# Altium PCB CH32Vx03C-R0-1v0.PcbDoc
Units mil, origin at the board's own origin, x right, y up, seen from the top; angles counter-clockwise.
Board outline 1801.31 x 2204.72 mil, 2 copper layers (Top Layer, Bottom Layer); 36 components, 55 nets, 190 pads, 257 vias.
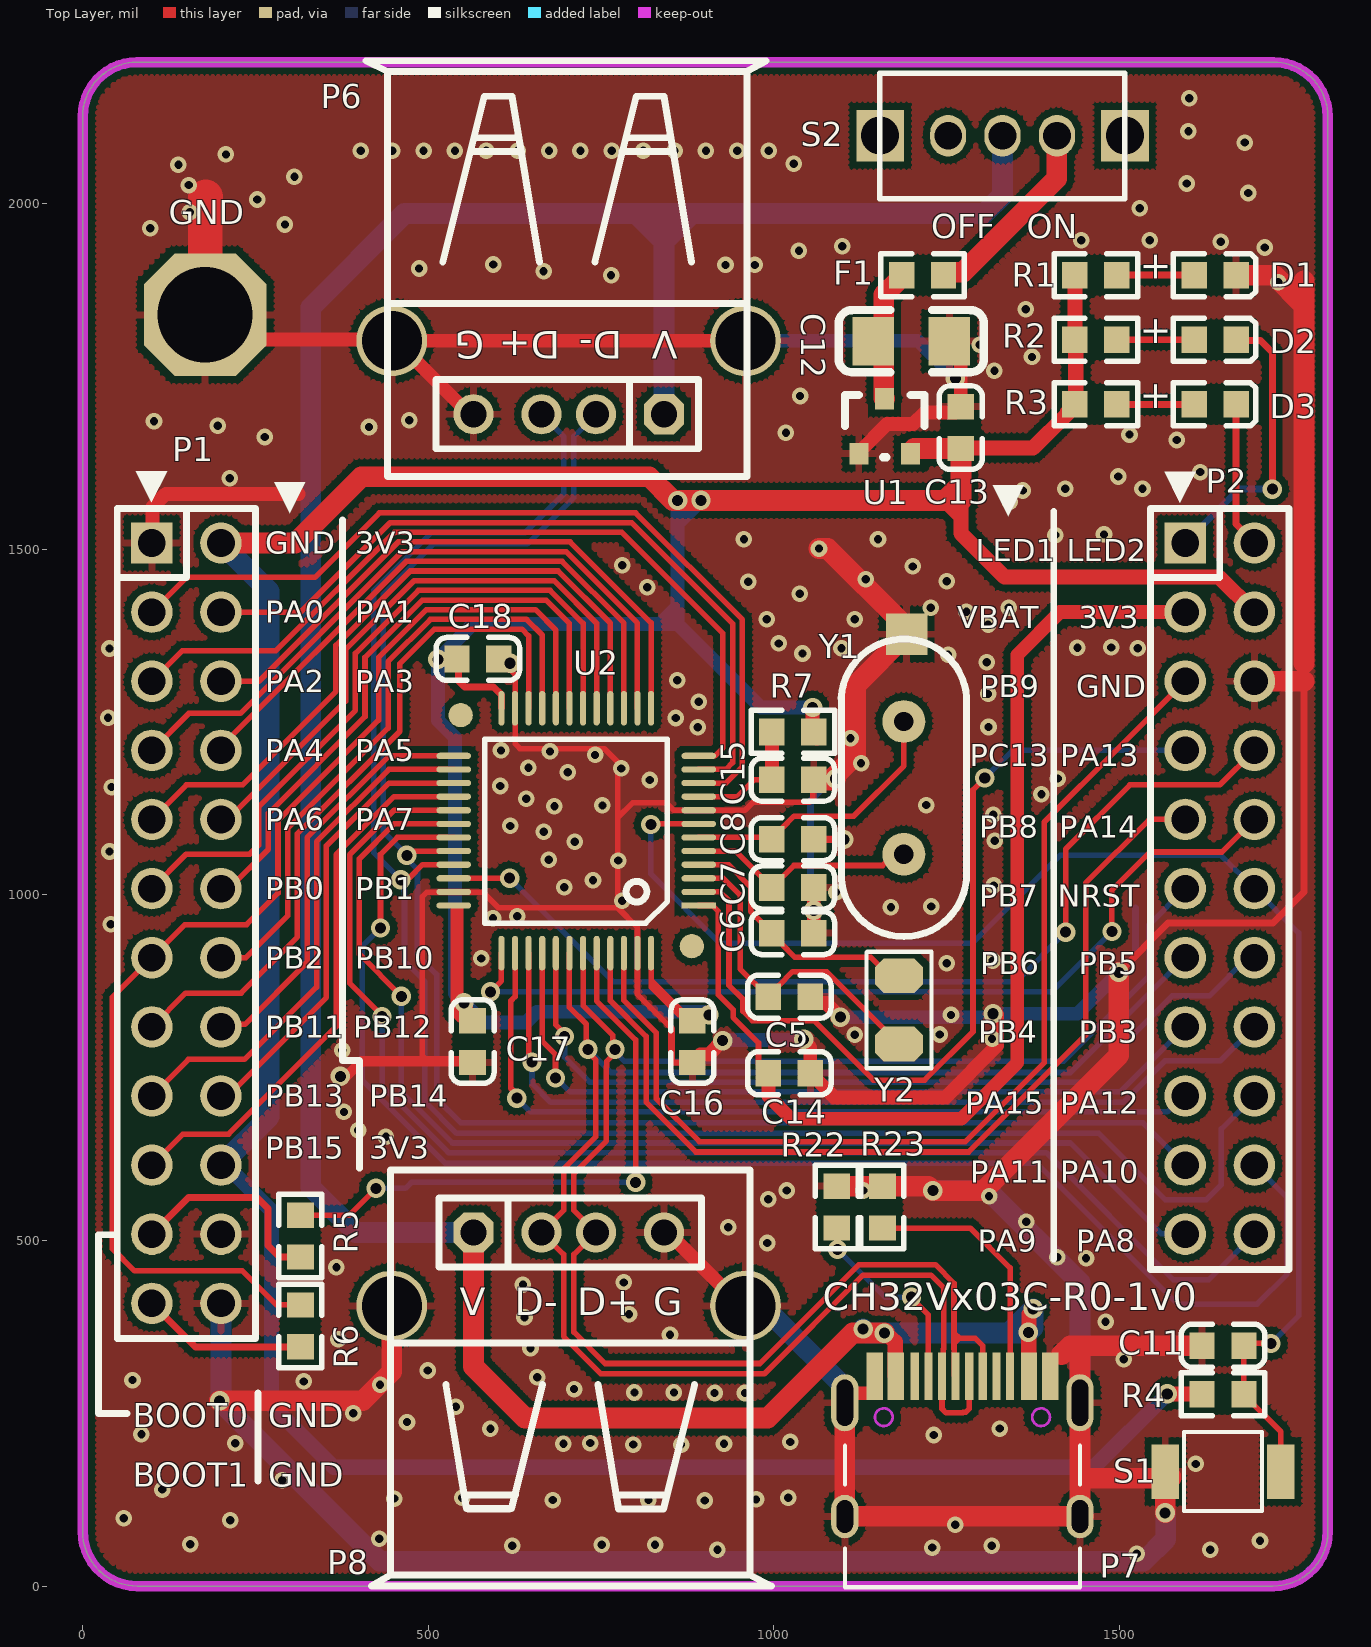
[diagram p0: Top Layer view]
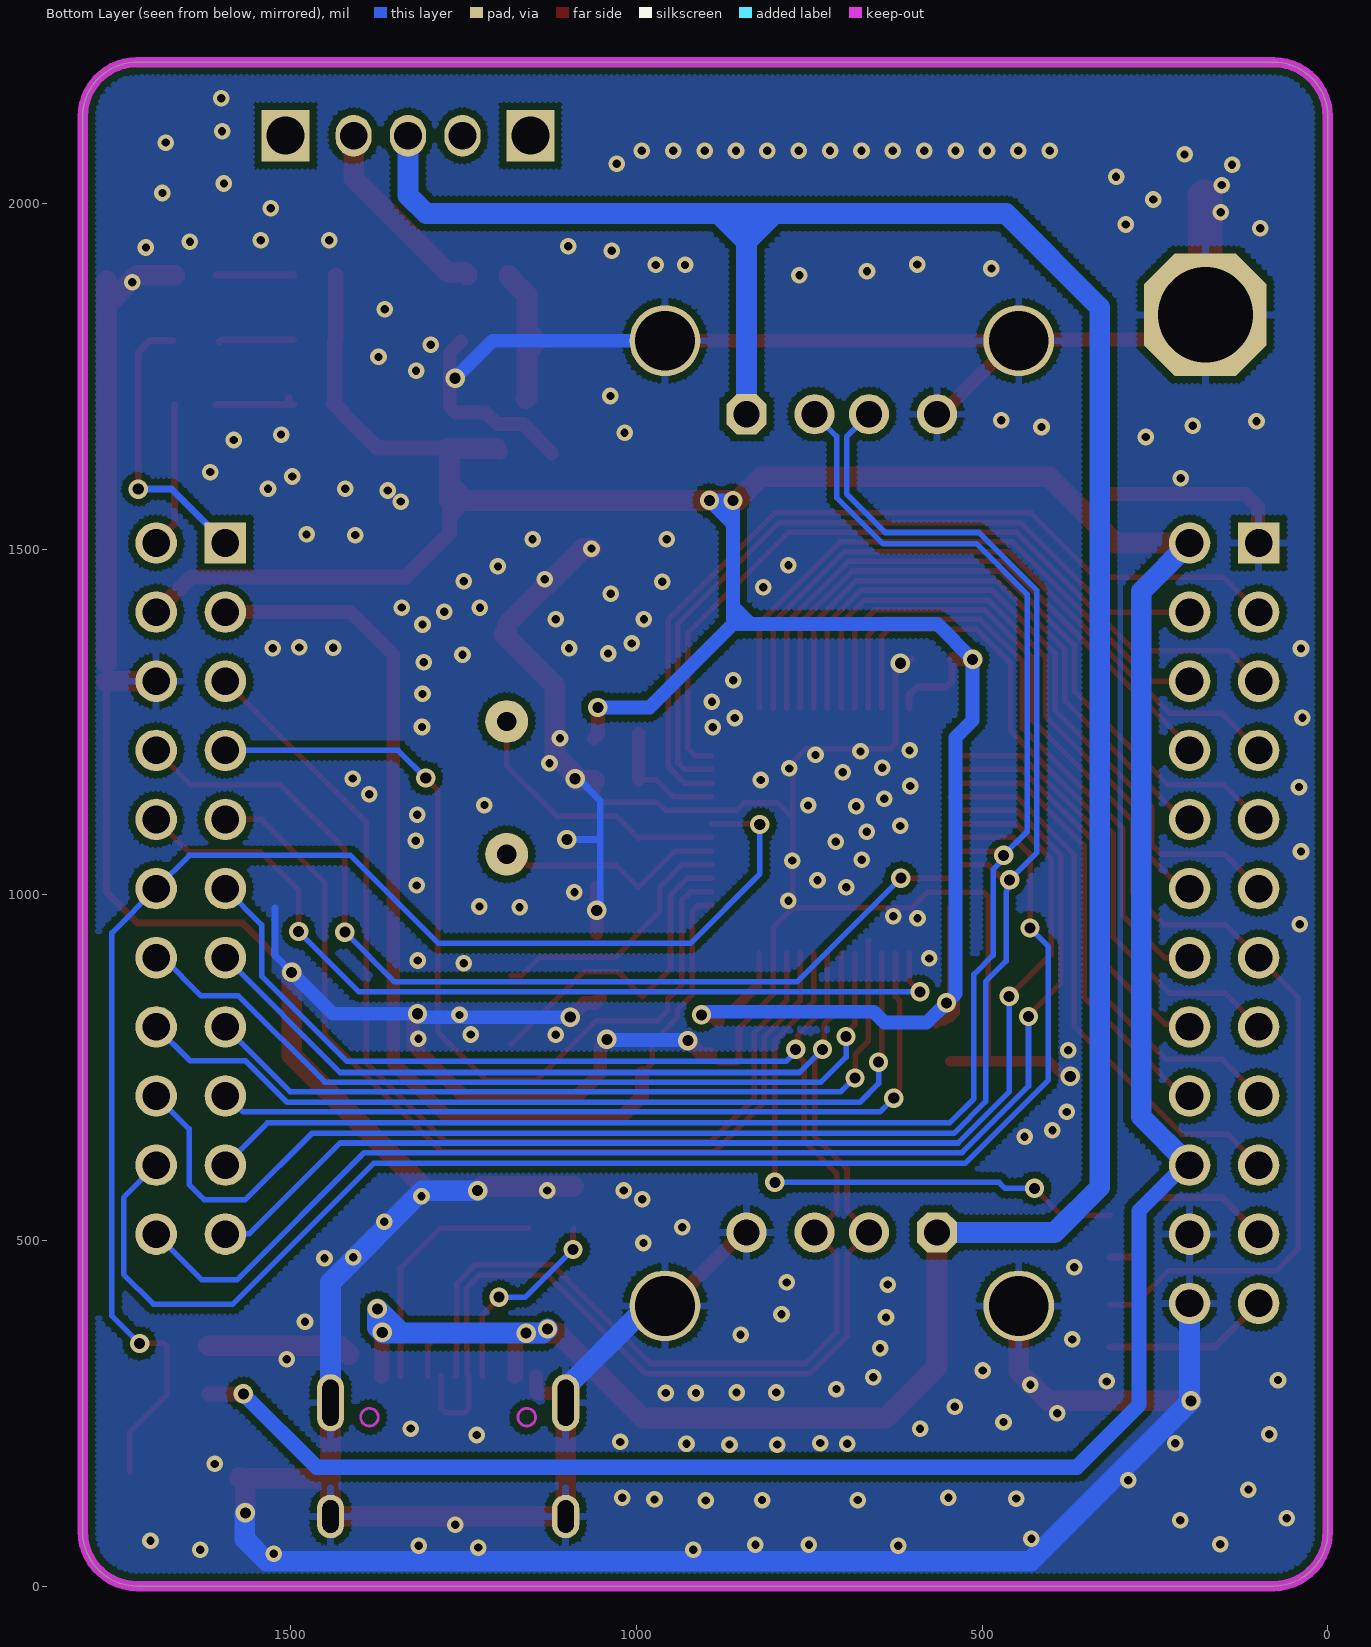
[diagram p1: Bottom Layer view, seen from below]

## Layer stack, top to bottom
Top Solder: solder mask 0.4, Solder Resist, Dk 3.5
Top Layer: signal copper 1.4
Dielectric 1: dielectric 12.6, FR-4, Dk 4.8
Bottom Layer: signal copper 1.4
Bottom Solder: solder mask 0.4, Solder Resist, Dk 3.5

## Board outline
78.74,0 cw(c78.74,78.74) 0,78.74 0,2125.98 cw(c78.74,2125.98) 78.74,2204.72 1722.6,2204.72 cw(c1722.6,2126.01) 1801.31,2126.01 1801.31,2126.13 1801.31,78.74 cw(c1722.57,78.74) 1722.57,0

## Design rules (kind name [scope] priority, off if disabled: settings)
Clearance Clearance_1 [InPolygon] p1: gap=10 ignorepadtopadclearanceinfootprint=FALSE
Clearance [All] p2: gap=6 ignorepadtopadclearanceinfootprint=FALSE
ComponentClearance [All] p1 off: gap=10 collisioncheckmode=3 verticalgap=10 showdistances=FALSE
DiffPairsRouting [All] p1: maxlimit=10 minlimit=7 mostfreqgap=8 toplayer_minwidth=6 toplayer_maxwidth=15 toplayer_prefwidth=8 bottomlayer_minwidth=6 bottomlayer_maxwidth=15 bottomlayer_prefwidth=8 maxuncoupledlength=500
MinimumSolderMaskSliver [All] p1 off: minsoldermaskwidth=10
PolygonConnect PolygonConnect_1 [IsVia] p1: connectstyle=Direct reliefconductorwidth=10 reliefentries=4 polygonreliefangle="90 Angle" airgapwidth=10
PolygonConnect [All] p2: connectstyle=Relief reliefconductorwidth=10 reliefentries=4 polygonreliefangle="90 Angle" airgapwidth=10
RoutingVias [All] p1: holewidth=16 width=28 viastyle="Through Hole" minholewidth=12 minwidth=24 maxholewidth=28 maxwidth=50
SilkToSilkClearance [All] p1 off: silktosilkclearance=10
SilkToSolderMaskClearance [IsPad] p1 off: minsilkscreentomaskgap=10 clearancetoexposedcopper=TRUE
SolderMaskExpansion [All] p1: expansion=4 istentingtop=FALSE
Width [All] p1: maxlimit=100 minlimit=6 preferedwidth=10
25 further rules are at their usual default settings.

## Components (designator, comment, footprint, x,y, rotation, side; value= is the part's Value field where it differs from the comment)
C5 "12pF" 0603_C 992,852.69 r0 top
C6 "12pF" 0603_C 997,944.69 r0 top
C7 "22pF" 0603_C 1057.63,1010.69 r180 top
C8 "22pF" 0603_C 1057.63,1080.69 r180 top
C11 "0.1uF" 0603_C 1619.38,347.69 r0 top
C12 "10uF" 3216_C 1143.72,1801.04 r180 top
C13 "2.2uF" 0603_C 1270.28,1645.71 r90 top
C14 "0.1uF" 0603_C 992,742 r0 top
C15 "0.1uF" 0603_C 997,1166.69 r0 top
C16 "0.1uF" 0603_C 882.01,757.37 r90 top
C17 "0.1uF" 0603_C 564,757.37 r90 top
C18 "0.1uF" 0603_C 601.99,1341.35 r180 top
D1 "POWER  red" 0603+ 1608.01,1896.57 r0 top
D2 "LED1" 0603+ 1608.01,1803.07 r0 top
D3 "LED2" 0603+ 1608.01,1709.57 r0 top
F1 "500mA" 0603 1245.42,1896.57 r180 top
P1 "HEADER 12x2" IDC24-2.54MM 100.01,1509.07 r270 top
P2 "HEADER 11x2" IDC22-2.54MM 1595.01,1509.07 r0 top
P6 "USB_A" USBAF 840.88,1695.37 r180 top
P7 "TYPE-C" TYPE-C-Receptacle-2.0 1272.68,303.38 r0 top
P8 "USB_A" USBAF 565.29,511.69 r0 top
R1 "1K" 0603 1496.01,1896.57 r180 top
R2 "1K" 0603 1435.38,1803.07 r0 top
R3 "1K" 0603 1435.38,1709.57 r0 top
R4 "10K" 0603 1680.01,277.69 r180 top
R5 "10K" 0603 315.01,536.69 r270 top
R6 "10K" 0603 315.01,406.69 r270 top
R7 "0Ω" 0603 1057.63,1235.69 r180 top
R22 "NC(5.1K)" 0603 1091.01,518 r90 top
R23 "NC(5.1K)" 0603 1157,518 r90 top
S1 "KEY" 贴片按键 1733.2,165.69 r180 top
S2 "SW" KEY2 1330.71,2098.35 r0 top
U1 "6219P33M" SOT-23 1122.76,1638.25 r0 top
U2 "CH32V203CxT" LQFP48 891.18,984.6 r90 top
Y1 "8M" XT_AT49 1188.01,1250.81 r180 top
Y2 "32.768k" FC-135 1181.01,784.26 r90 top

## Footprints (in the part's own frame and the unit in brackets; to place one, negate y for a bottom-side part, rotate by r counter-clockwise, add the part's x,y. Pads: shape width x height; smd on the part's side, far side on the other; paste and mask are expansions set on the pad)
0603 [mm]
  rect 0.93x0.98 smd: 1(0,0) 2(1.54,0)
  silkscreen extent -0.76,-0.79 2.3,0.79
0603+ [mm]
  rect 0.93x0.98 smd: 1(0,0) 2(1.54,0)
  silkscreen extent -0.76,-0.79 2.27,0.79
0603_C [mm]
  rect 0.93x0.98 smd: 1(0,0) 2(1.54,0)
  silkscreen extent -0.76,-0.79 2.31,0.79
3216_C [mil]
  rect 60x70 smd: 1(0,0) 2(-110,0)
  silkscreen extent -160,-45 50,45
FC-135 [mil]
  oct 50x70 smd: 1(0,0) 2(98.43,0)
  silkscreen extent -35,-47 133,47
IDC22-2.54MM [mil]
  rect 60x60 hole 40: 1(0,0)
  round 60 hole 40: 2(100,0) 3(0,-100) 4(100,-100) 5(0,-200) 6(100,-200) 7(0,-300) 8(100,-300) 9(0,-400) 10(100,-400) 11(0,-500) 12(100,-500) 13(0,-600) 14(100,-600) 15(0,-700) 16(100,-700) 17(0,-800) 18(100,-800) 19(0,-900) 20(100,-900) 21(0,-1000) 22(100,-1000)
  silkscreen extent -50,-1051 150,50
IDC24-2.54MM [mil]
  rect 60x60 hole 40: 1(0,0)
  round 60 hole 40: 2(0,100) 3(100,0) 4(100,100) 5(200,0) 6(200,100) 7(300,0) 8(300,100) 9(400,0) 10(400,100) 11(500,0) 12(500,100) 13(600,0) 14(600,100) 15(700,0) 16(700,100) 17(800,0) 18(800,100) 19(900,0) 20(900,100) 21(1000,0) 22(1000,100) 23(1100,0) 24(1100,100)
  silkscreen extent -50,-50 1151,150
KEY2 [mm]
  rect 1.75x1.9 hole 1.4: 0(-4.5,0) 0(4.5,0)
  oval 1.321x1.524 hole 1.016: 1(0,0) 2(-2,0) 3(2,0)
  silkscreen extent -4.51,-2.31 4.5,2.29
LQFP48 [mm]
  round 0.889 smd: 0(-1.496,0.254) 0(6.996,8.746)
  rect 0.229x1.27 smd: 1(0,0)
  oval 0.229x1.27 smd: 2(0.5,0) 3(1,0) 4(1.5,0) 5(2,0) 6(2.5,0) 7(3,0) 8(3.5,0) 9(4,0) 10(4.5,0) 11(5,0) 12(5.5,0) 25(5.5,9) 26(5,9) 27(4.5,9) 28(4,9) 29(3.5,9) 30(3,9) 31(2.5,9) 32(2,9) 33(1.5,9) 34(1,9) 35(0.5,9) 36(0,9)
  oval 1.27x0.229 smd: 13(7.25,1.75) 14(7.25,2.25) 15(7.25,2.75) 16(7.25,3.25) 17(7.25,3.75) 18(7.25,4.25) 19(7.25,4.75) 20(7.25,5.25) 21(7.25,5.75) 22(7.25,6.25) 23(7.25,6.75) 24(7.25,7.25) 37(-1.75,7.25) 38(-1.75,6.75) 39(-1.75,6.25) 40(-1.75,5.75) 41(-1.75,5.25) 42(-1.75,4.75) 43(-1.75,4.25) 44(-1.75,3.75) 45(-1.75,3.25) 46(-1.75,2.75) 47(-1.75,2.25) 48(-1.75,1.75)
  silkscreen extent -0.65,1.15 6.11,7.86
SOT-23 [mm]
  rect 0.7x0.8 smd: 1(0,0) 2(1.9,0) 3(0.95,2.02)
  silkscreen extent -0.51,-0.13 2.41,2.16
TYPE-C-Receptacle-2.0 [mm]
  oval 1x1.6 hole 0.6 slot 1.2 at 90 deg: 0(-4.32,-5.15) 0(4.32,-5.15)
  oval 1x2.1 hole 0.6 slot 1.7 at 90 deg: 0(-4.32,-0.97) 0(4.32,-0.97)
  rect 0.6x1.75 smd: A1(-3.225,0) A4(-2.45,0) B1(3.225,0) B4(2.45,0)
  rect 0.3x1.75 smd: A5(-1.25,0) A6(-0.25,0) A7(0.25,0) A8(1.25,0) B5(1.75,0) B6(0.75,0) B7(-0.75,0) B8(-1.75,0)
  Keep-Out Layer circle w0.1: c-2.89,-1.5 r0.325
  Keep-Out Layer circle w0.1: c2.89,-1.5 r0.325
  silkscreen extent -4.32,-7.75 4.32,-2.55
USBAF [mm]
  round 2.6 hole 2.2: 0(-3,-2.7) 0(10,-2.7)
  oct 1.473x1.473 hole 0.965: 1(0,0)
  round 1.473 hole 0.965: 2(2.5,0) 3(4.5,0) 4(7,0)
  silkscreen extent -3.75,-12.99 10.95,2.29
XT_AT49 [mil]
  rect 60x60 smd: 0(-3.99,-126.19)
  round 62 hole 28: 1(0,0) 2(0,192.13)
  silkscreen extent -91,-119 91,311
贴片按键 [mm]
  rect 1x2 smd: 1(0,0) 2(4.242,0)
  silkscreen extent 0.69,-1.45 3.55,1.45

## Part data
C5 C6 C7 C8 C11 C14 C15 C16 C17 C18: library part Cap, "Capacitor", LatestRevisionDate=17-Jul-2002, LatestRevisionNote="Re-released for DXP Platform.", PackageReference=RAD-0.3, Published=8-Jun-2000, Publisher="Altium Limited"
C12 C13: library part CAP, "Capacitor"
D1 D2 D3: library part LED0, "Typical INFRARED GaAs LED", LatestRevisionDate=08-Jul-2005, LatestRevisionNote="Mech Layer 1 removed.", PackageReference=LED-0, Published=8-Jun-2000, Publisher="Altium Limited"
F1: library part FUSE1, "Fuse"
P1 P2: library part "Header 10X2", "Header, 10-Pin, Dual row"
P6 P8: library part USB, "USB Port"
P7: library part TYPE-C1
R1 R2 R3: library part "Res Semi", "Semiconductor Resistor", LatestRevisionDate=17-Jul-2002, LatestRevisionNote="Re-released for DXP Platform.", PackageReference=AXIAL-0.5, Published=8-Jun-2000, Publisher="Altium Limited"
R4 R5 R6 R7 R22 R23: library part Res2, "Resistor"
  R4 R5 R6 R7: LatestRevisionDate=17-Jul-2002, LatestRevisionNote="Re-released for DXP Platform.", PackageReference=AXIAL-0.4, Published=8-Jun-2000, Publisher="Altium Limited"
U2: library part CH32V303C, "RISC-V FPU HD-MCU, 144MHz, 8*UART, 10*Timer, 4*OPA"
Y1 Y2: library part XTAL, "Crystal Oscillator", LatestRevisionDate=17-Jul-2002, LatestRevisionNote="Re-released for DXP Platform.", PackageReference=R38, Published=8-Jun-2000, Publisher="Altium Limited"

## Free pads (board coordinates)
  oct 177.17x177.17 hole 137.8: 0(177.08,1839.16)

## Via types
v1: diameter 24, hole 12, Top Layer to Bottom Layer, tented both sides, 209 vias
v2: diameter 28, hole 16, Top Layer to Bottom Layer, tented both sides, 48 vias

## Nets (pads, with @x,y where several pads share a name; then routed paths per layer and width w, separated by ;. In a path a pad name is that pad's centre, name@x,y a point inside that pad or via, vN(x,y) a via of type N, cw(c..) or ccw(c..) an arc to the next point about the centre after c; other vN are vias at no path point)
+5V: P6.1 P7.A4 P7.B4 P8.1 S2.1 | length 4456.6
  Top Layer w22: v2(1159.82,366) 1160.97,364.85 1163.9,364.85 1175.41,353.33 1175.41,304.19 P7.A4 ; P7.B4 1368.57,303.95 1368.57,366.43 v2(1368,367) 1369.15,368.15 1369.15,393.52 1375,399.38 v2(1375,401)
  Top Layer w30: P8.1 565.29,317.71 640,243 991,243 1114,366 v2(1159.82,366)
  Bottom Layer w30: P8.1 395.31,511.69 330,577 330,1849.92 465.68,1985.6 800.16,1985.6 ; P6.1 840.88,1944.88 ; v2(1129,372) 1135,366 v2(1159.82,366) 1340,366 ; S2.1@1330.71,2085.35 1330.71,2011.96 1304.35,1985.6 881.61,1985.6 ; 800.16,1985.6 850.21,1985.6 ; 800.16,1985.6 840.88,1944.88 ; 840.88,1944.88 881.61,1985.6 ; 840.88,1944.88 840.88,1976.27 850.21,1985.6 ; 850.21,1985.6 881.61,1985.6 ; 1340,366 v2(1375,401) 1375,374 v2(1368,367) 1367,366 1340,366
BOOT0: R5.1 U2.44 | length 859.7
  Top Layer w8: R5.1 385.71,536.69 v2(424.34,575.31) ; U2.44 743.54,846.53 800,790.07 v2(800,584)
  Bottom Layer w8: v2(424.34,575.31) 466.98,575.31 475.66,584 v2(800,584)
BOOT1: P1.13 R6.1 U2.20 | length 1783
  Top Layer w8: R6.1 280.31,406.69 231,456 75,456 43,488 43,852.05 P1.13 147.95,957 237,957 282.49,1002.49 282.49,1107.37 427.95,1252.82 427.95,1343.43 497.07,1412.55 654.75,1412.55 684.49,1382.81 U2.20
GND: C5.2 C6.2 C7.1 C8.1 C11.1 C12.2 C13.2 C14.2 C15.2 C16.1 C17.1 C18.1 D1.2 P1.1 P1.22 P1.24 P2.6 P6.0 P6.4 P7.0 P7.A1 P7.B1 P8.0 P8.4 pad.0 R22.2 R23.2 S1.2 U1.1 U2.8 U2.23 U2.35 U2.47 Y1.0 | length 11892.1
  Top Layer w8: 499,759.37 491,767.37 491,997.06 498.03,1004.09 578.76,1004.09 601.49,981.37 v1@774.05,981.37 ; C18.1 601.99,1340.37 C18.1@616.3,1326.06 ; v2(618.37,1335.07) 618.37,1328.14 C18.1@616.3,1326.06 ; 851.72,759.28 853.63,757.37 C16.1 C16.1@893.62,768.98 ; 851.72,806.9 802.6,856.03 U2.47 802.4,915.89 802.4,953.02 v1@774.05,981.37 ; C15.2@1061,1166 1056,1161 1056,1138.69 1051.31,1134 969.69,1134 958.08,1122.39 U2.8 890.99,1122.59 854.84,1122.59 843.91,1133.52 795.96,1133.52 774.05,1111.61 ; C18.1@616.3,1326.06 618.4,1326.06 625.43,1319.03 U2.23 625.43,1218.69 632.46,1211.66 754.52,1211.66 774.05,1192.13 774.05,1111.61 ; v1@774.05,981.37 774.05,1111.61
  Top Layer w10: 851.72,759.28 851.72,806.9 ; C8.1 1058.32,1080 v2(1101,1080) v2@1106,1080 ; v2(1499,888) 1570,959 1722,959 1767,1004 1767,1309 1767,1335
  Top Layer w15: v2(372.65,737.52) 381.63,737.52 403.48,759.37 499,759.37 C17.1@546,759.37
  Top Layer w20: P1.1 101,1510.05 101,1561 120,1580 312,1580 ; pad.0 212.97,1803.27 445.58,1803.27 447.18,1801.67 P6.0@453.09,1801.67 ; P6.4 559.39,1695.37 P6.0@453.09,1801.67 ; P8.4 846.79,511.69 953.09,405.39 P8.0@958.99,405.39 ; C16.1@893.62,768.98 905.79,768.98 v2(925.81,789) ; P6.0@958.99,1801.67 P6.0@453.09,1801.67 ; v2(1043,791) 1043,788.84 1052.63,779.21 C14.2 ; C5.2 1052.63,851.7 1060.94,843.39 1075.61,843.39 v2(1096,823) ; C6.2 C7.1 ; C14.2@1061.92,732.71 1087.63,707 1248,707 1323,782 1323,827 v2@1322,828 ; P7.0@1102.6,265.19 1102.6,269.98 1111.55,278.93 1143.9,278.93 1145.71,280.74 P7.A1 ; U1.1 1122.76,1640.22 1163.73,1681.19 1201.47,1681.19 1218.31,1698.03 1261.98,1698.03 C13.2 1270.28,1784.48 C12.2
  Top Layer w30: v2(198,268) 405,268 447.18,310.18 P8.0@447.18,405.39 ; C15.2@1061,1166 1087,1166 v2(1089,1168) ; v1(1065.27,1501.01) 1077.69,1501.01 1187,1391.7 Y1.0@1187,1377 ; v2@1084,1168 1118,1202 1118,1303 Y1.0 ; R22.2 R23.2 1223.37,578.63 v2(1230,572) 1303,572 1499,768 v2(1499,888) ; P7.0@1102.6,100.62 1102.98,101 P7.0@1442.76,101 ; P7.0@1102.6,265.19 1102.6,108.4 P7.0@1103,108 ; 1416,335 1428.69,347.69 C11.1 ; 1442,345 1442.76,344.24 P7.0@1442.76,265.19 ; P7.0@1442.76,100.62 P7.0@1442.76,101 ; P7.0@1446,268 1442.76,264.76 1442.76,156 ; P7.0@1448,101 P7.0@1442.76,101 ; v2(1566,106) 1566,154 S1.2@1568,156 ; S1.2@1575,157 1574,156 S1.2@1568,156 ; D1.2 1723.31,1896.57 1767,1852.88 ; P2.6@1695.01,1309 1767,1309 ; 1767,1335 1767,1852.88 ; 1767,1888 1767,1852.88 ; P7.0@1442.76,101 1442.76,156 ; 1442.76,156 S1.2@1568,156
  Top Layer w50: pad.0 177.08,2009.07 178.12,2010.11
  Bottom Layer w10: v2@1052.63,977.69 1052.63,1080 ; v2@1084,1168 1052.63,1136.63 1052.63,1080 ; v2(1101,1080) 1052.63,1080 ; v2(1499,888) 1523,912 1523,981
  Bottom Layer w20: v2(925.81,789) 926.81,790 1042,790 v2(1043,791) ; P6.0@958.99,1801.67 1208.17,1801.67 v2(1262.42,1747.42) ; v2(1096,823) 1317,823 1322,828 1439,828 v2(1499,888)
  Bottom Layer w30: P1.24 200.01,270.01 v2(198,268) 430,36 1535,36 1567,68 1567,105 v2(1566,106) ; P8.0@970,400 978.46,391.54 997.91,391.54 1102.6,286.84 P7.0@1102.6,265.19 ; v2(1230,572) 1310,572 1442.76,439.24 P7.0@1442.76,265.19
  other v1: 1524.74,46.74 918.23,52.59 1631.27,52.66 1229.21,55.68 621.44,58.3 1315.17,58.54 750.71,59.98 828.07,59.98 155.73,60.32 1703.27,65.49 428.8,68.29 1262.16,88.63 213.34,95.4 59.28,97.92 900.03,123.75 679.93,124.46 818.46,124.46 974.13,125.36 450.81,126.59 548.85,127.66 1020.85,127.78 114.88,139.63 288.83,153.23 1610.15,176.69 796.49,204.73 865.65,204.73 695.45,205.81 927.76,206.04 220.63,206.52 734.35,206.89 1023.44,208.51 1231.29,218.52 84.92,219.54 589.86,227.74 1326.83,227.88 469.13,237.27 391.29,249.97 539.82,259.51 798.15,280.1 855.34,280.1 914.14,279.29 958.04,279.29 710.88,284.98 430.21,291.28 319.81,296.04 72.07,298.02 657.6,302.24 499.31,311.93 1506.17,328 647.76,344.21 369.68,356.86 849.6,363.7 1479.76,382.49 639.19,388.63 790.37,393.31 636.85,436.17 782.58,439.29 367.04,461.1 1451.56,474.44 1410.1,475.75 990.15,496.36 933.95,519.25 1365.15,526.88 991.87,559.42 1311.22,563.96 1018.45,572.29 1129.07,572.29 438.67,650.07 398.42,659.34 377.87,685.98 375.55,775.16 1315.62,791.86 1117.06,797.44 1239.98,797.96 1256.2,826.34 1250.07,901.03 1316.57,905.07 576.47,908.06 40.73,957.59 593.6,966.28 628.52,969.12 1169.3,981.9 1227.4,983.18 780.38,991.52 1089.94,1003.69 696.57,1011.16 1318.01,1013.63 738.22,1021.15 774.68,1049.63 674.42,1050.77 38.72,1062.79 712.02,1076.98 1319.45,1078.34 666.84,1091.2 618.59,1099.76 1317.29,1115.73 682.4,1128.25 751.9,1129.38 1220.18,1129.91 641.68,1139.22 1386.96,1145.77 41.73,1155.98 603.94,1157.52 820.23,1166.13 1410.53,1168.25 701.76,1177.24 779.24,1182.93 644.8,1184.07 1126.06,1190.53 741.23,1202.5 676.02,1207.51 605.09,1208.97 1110.77,1226.77 889.75,1242.62 1310.4,1242.86 36.72,1256.18 857.85,1255.85 891.02,1279.36 1309.8,1290.69 860.13,1310.54 1308.01,1336.71 1251.91,1347.39 1041.28,1349.24 38.72,1356.37 1097.72,1356.87 1526.23,1356.87 1439.05,1357.42 1487.85,1357.97 1006.96,1363.73 1309.8,1391.11 989.42,1398.82 1116.78,1398.82 1278.46,1409.72 1226.69,1415.48 1339.69,1415.62 1037.47,1435.42 816.84,1444.98 962.73,1452.96 1250.01,1453.73 1132.8,1456.78 1200.63,1475.16 780.38,1476.88 956.55,1514.45 1150.5,1514.45 1407.1,1520.5 1477.49,1521.44 1341.39,1569 1359.89,1585.06 1421.29,1587.39 1533.22,1587.39 212.81,1602.69 1498.24,1605.27 1616.76,1611.68 1582.96,1658.12 263.52,1662.36 1514.35,1665.9 1017.36,1668.52 414.19,1676.94 195.47,1678.56 103.12,1685.04 472.51,1686.66 1037.84,1721.79 1319.01,1758.35 1373.39,1778.28 1297.72,1795.69 1364.33,1847.17 1729.74,1886.47 764.41,1896.63 666.7,1902.38 486.62,1906.21 593.9,1911.96 929.9,1911.33 972.14,1911.33 1036.15,1931.9 1709.9,1936.58 1098.83,1938.2 1646.22,1944.93 1444.75,1947.01 1543.92,1947.01 97.61,1964.29 292.5,1969.87 155,1987.77 1529.36,1993.34 252.4,2006.04 1686.02,2015.46 153.26,2026.91 1597.04,2029.17 306.32,2039.08 138.48,2056.48 1028.73,2057.7 207.18,2071.26 402.32,2076.72 447.71,2076.72 493.1,2076.72 538.49,2076.72 583.88,2076.72 629.27,2076.72 674.66,2076.72 720.05,2076.72 765.44,2076.72 810.83,2076.72 856.22,2076.72 901.61,2076.72 947,2076.72 992.39,2076.72 1681.32,2088.34 1599.69,2104.81 1601.02,2152.58
  other v2: 1317,828 1057.63,977.69
LED1: D2.2 P2.1 | length 413.2
  Top Layer w10: D2.2@1671,1801.83 1704.05,1801.83 1721,1784.88 v2(1721,1587)
  Bottom Layer w10: P2.1 1620.01,1534.07 1672.95,1587 v2(1721,1587)
LED2: D3.2 P2.2 | length 207.7
  Top Layer w10: D3.2 1668.64,1536.36 P2.2@1693,1512
NetD1_1: D1.1 R1.1 | length 113.9
  Top Layer w10: R1.1 R1.1@1508.31,1896.57 ; R1.1@1507,1897.88 R1.1@1508.31,1896.57 ; D1.1 R1.1@1508.31,1896.57
NetD2_1: D2.1 R2.2 | length 109.3
  Top Layer w10: R2.2 1600.81,1803.07 D2.1@1604,1799.88
NetD3_1: D3.1 R3.2 | length 124.9
  Top Layer w10: R3.2 R3.2@1509.32,1709.57 ; R3.2@1503,1719.88 1503,1715.89 R3.2@1509.32,1709.57 ; D3.1 R3.2@1509.32,1709.57
NetF1_1: F1.1 S2.3 | length 271.4
  Top Layer w30: F1.1 1245.42,1897.55 1248.73,1900.86 1273.74,1900.86 1409.09,2036.21 1409.09,2084.99 S2.3@1409.45,2085.35
NetP1_21: P1.21 R5.2 | length 303.6
  Top Layer w10: P1.21 152.95,562 252,562 268,546 268,493 284.94,476.06 R5.2
NetP1_23: P1.23 R6.2 | length 241.1
  Top Layer w10: P1.23 163.03,346.06 R6.2
NetP7_A5: P7.A5 R22.1 | length 291.7
  Top Layer w8: R22.1 1092,517.01 v2(1092,487) ; v2(1199,418) 1199,416.83 1223.47,392.36 P7.A5
  Bottom Layer w8: v2(1092,487) 1161,418 v2(1199,418)
NetP7_B5: P7.B5 R23.1 | length 365.5
  Top Layer w8: R23.1 1284,518 1341.58,460.42 P7.B5
NRST: C11.2 P2.12 R4.1 S1.1 U2.7 | length 2074.1
  Top Layer w8: v2(821.83,1101.81) 822.73,1102.71 U2.7 ; v2(1719,351) 1683.33,351 C11.2 R4.1 1680.01,276.7 1733.2,223.52 S1.1
  Bottom Layer w8: v2(821.83,1101.81) 821.83,1030.26 922.25,929.84 1286.84,929.84 1414,1057 1647.08,1057 P2.12 1759,945.08 1759,391 v2(1719,351)
PA0: P1.3 U2.10 | length 1263.2
  Top Layer w8: P1.3 150.21,1459.26 335.82,1459.26 429.11,1552.55 799.8,1552.55 954.25,1398.1 954.25,1376.28 954.25,1185.42 930.59,1161.76 U2.10
PA1: P1.4 U2.11 | length 1108.6
  Top Layer w8: P1.4 315.39,1409.07 444.88,1538.55 794,1538.55 940.25,1392.31 940.25,1370.48 940.25,1191.21 930.48,1181.45 U2.11
PA2: P1.5 U2.12 | length 1181.6
  Top Layer w8: P1.5 143.95,1353 279.13,1353 450.68,1524.55 780.12,1524.55 926.25,1378.43 926.25,1212.67 914.71,1201.13 U2.12
PA3: P1.6 U2.13 | length 877.6
  Top Layer w8: P1.6 254.99,1309.07 456.48,1510.55 705.16,1510.55 822.28,1393.43 U2.13
PA4: P1.7 U2.14 | length 987.7
  Top Layer w8: P1.7 153.43,1262.48 228.21,1262.48 462.28,1496.55 699.36,1496.55 802.6,1393.31 U2.14
PA5: P1.8 U2.15 | length 859.5
  Top Layer w8: P1.8 200.01,1214.49 468.07,1482.55 693.56,1482.55 782.91,1393.2 U2.15
PA6: P1.9 U2.16 | length 1005.6
  Top Layer w8: P1.9 150.09,1159.15 231.29,1159.15 366.38,1294.24 366.38,1361.06 473.87,1468.55 687.76,1468.55 763.23,1393.09 U2.16
PA7: P1.10 U2.17 | length 879.1
  Top Layer w8: P1.10 209.27,1109.07 380.38,1280.18 380.38,1355.26 479.67,1454.55 681.96,1454.55 743.54,1392.97 U2.17
PA8: P2.22 U2.29 | length 1937.7
  Top Layer w8: v2@434.53,824 386.14,872.39 386.14,1058.07 450.47,1122.39 U2.29
  Bottom Layer w8: v2(433,824) 433,723.19 529.19,627 1394,627 1578,443 1628.95,443 P2.22
PA9: P2.21 U2.30 | length 1739.4
  Top Layer w8: v2(461.02,853.27) 400.14,914.16 400.14,1052.27 450.58,1102.71 U2.30
  Bottom Layer w8: v2(461.02,853.27) 461.02,714.97 534.99,641 1429,641 1560.53,509.47 1594.61,509.47 P2.21
PA10: P2.20 U2.31 | length 2121
  Top Layer w8: v2(430.82,952.16) 430.82,1058.53 455.32,1083.02 U2.31
  Bottom Layer w8: v2(430.82,952.16) 404.18,925.52 404.18,732.21 524.39,612 1380,612 1584,408 1699,408 1742,451 1742,562.08 P2.20
PA11: P2.19 P6.2 U2.32 | length 2421.8
  Top Layer w8: v2(468.96,1057.23) 474.37,1057.23 480.48,1063.34 U2.32
  Bottom Layer w8: v2(468.96,1057.23) 468.96,1057.49 434.81,1091.64 434.81,1434.78 507.74,1507.71 643.48,1507.71 710.51,1574.75 710.51,1663.42 P6.2 ; v2@469.59,1056.87 469.59,1051.19 484.33,1036.45 484.33,912.74 512,885.07 512,705 547,670 1534.08,670 P2.19
PA12: P2.18 P6.3 U2.33 | length 2685.9
  Top Layer w8: v2(460.33,1021.65) 464.16,1025.47 473.67,1025.47 491.85,1043.65 U2.33
  Bottom Layer w8: P6.3 695.94,1663.15 695.94,1579.97 640.22,1524.26 504.49,1524.26 420.81,1440.58 420.81,1061.16 464.16,1017.82 464.16,1005.98 465.52,1004.62 465.52,904.15 495,874.67 495,700.79 540.79,655 1470,655 1566,559 1625.56,559 1647.3,580.75 1647.3,661.36 P2.18
PA13: P2.8 U2.34 | length 1429.6
  Top Layer w8: U2.34 537.04,1024.16 v2(617.62,1024.19) ; v2(1422,946) 1422,1066 1515,1159 1644.95,1159 P2.8
  Bottom Layer w8: v2(617.62,1024.19) 767.81,874 1350,874 v2(1422,946)
PA14: P2.10 U2.37 | length 1305.8
  Top Layer w8: v2(590.05,859.75) 605.75,875.45 U2.37 ; v2(1489,947) 1489,1007 1544,1062 1647.95,1062 P2.10
  Bottom Layer w8: v2(590.05,859.75) 1401.75,859.75 v2(1489,947)
PA15: P2.17 U2.38 | length 1200.8
  Top Layer w8: U2.38 625.43,852.72 619.22,846.51 619.22,720.2 628,711.41 v2(628,706)
  Bottom Layer w8: v2(628,706) 648,686 1569.31,686 1592.38,709.07 P2.17
PB0: P1.11 U2.18 | length 1025.9
  Top Layer w8: P1.11 149.8,1058.86 241.55,1058.86 254.49,1071.8 254.49,1127.07 394.38,1266.96 394.38,1349.46 485.47,1440.55 676.16,1440.55 723.86,1392.86 U2.18
PB1: P1.12 U2.19 | length 894.5
  Top Layer w8: P1.12 211.56,1009.07 268.49,1066 268.49,1118.01 408.38,1257.89 408.38,1343.66 491.27,1426.55 670.36,1426.55 704.17,1392.74 U2.19
PB3: P2.16 U2.39 | length 1292.1
  Top Layer w8: U2.39 645.12,768.3 650,763.41 v2(650,758)
  Bottom Layer w8: v2(650,758) 650,727 677,700 1505.75,700 1565.75,760 1645.95,760 P2.16
PB4: P2.15 U2.40 | length 1165.5
  Top Layer w8: U2.40@664.34,934.41 664.8,933.95 U2.40 ; U2.40@664.99,915.43 664.99,788.01 684,769 v2(684,735)
  Bottom Layer w8: v2(684,735) 685.05,735 705.05,715 1500.95,715 P2.15
PB5: P2.14 U2.41 | length 1243.2
  Top Layer w8: U2.41 684.49,812.03 697,799.52 v2(697,795)
  Bottom Layer w8: v2(697,795) 697,765.39 733.39,729 1451,729 1576,854 1630,854 1685.07,909.07 P2.14
PB6: P2.13 P7.A7 P7.B7 P8.2 U2.42 | length 2460.3
  Top Layer w8: U2.42 704.17,837.3 728.66,812.81 728.66,778.86 v2(731,776.51) ; v2@731,769 734.51,769 742.51,761 742.51,650.19 695.59,603.26 695.59,543.56 P8.2 695.59,479.82 695.59,361.11 749.7,307 986,307 1129,450 1227.21,450 1245.5,431.72 1245.5,343.36 1245.06,342.92 1245.06,305.28 P7.B7 1243.15,256.55 1249.01,250.69 1273.01,250.69 1274.01,251.69 1277.84,251.69 1282.52,256.37 P7.A7
  Bottom Layer w8: v2@731.98,769.98 737.53,769.98 764.51,743 1428.95,743 P2.13
PB7: P2.11 P7.A6 P7.B6 P8.3 U2.43 | length 2486.8
  Top Layer w8: U2.43 723.86,839.82 766.54,797.14 766.54,785.05 770,781.59 770,771.1 758,759.1 758,752.06 757.51,751.57 757.51,643.97 710.59,597.05 710.59,543.56 P8.3 710.59,479.82 710.59,367.33 755.91,322 979.79,322 1122.79,465 1233.43,465 1260.5,437.93 1260.5,366.35 ; P7.A6 1260.93,305.28 1260.93,342.92 1260.5,343.36 1260.5,351.02 ; P7.B6 1302.21,347.49 1291.01,358.69 1268.16,358.69 ; 1260.5,351.02 1268.16,358.69 ; 1260.5,351.02 1260.5,358.69 ; 1260.5,358.69 1260.5,366.35 ; 1260.5,358.69 1268.16,358.69 ; 1260.5,366.35 1268.16,358.69
  Bottom Layer w8: v2(770,776.51) 770,772.68 783.68,759 1419,759 1542.4,882.4 1542.4,956.45 P2.11
PB8: P2.9 U2.45 | length 1374.9
  Top Layer w8: U2.45 763.23,847.12 815,795.35 815,700.2 887.2,628 1281.8,628 1451,797.2 1451,1017 1543.07,1109.07 P2.9
PB9: P2.5 U2.46 | length 1500.7
  Top Layer w8: U2.46 782.91,847.39 830,800.3 830,705 892,643 1277,643 1391,757 1391,1105.05 1499.03,1213.09 P2.5
PB10: P1.14 U2.21 | length 913.2
  Top Layer w8: P1.14 236.07,909.07 296.49,969.49 296.49,1095.92 441.95,1241.38 441.95,1337.63 502.87,1398.55 642.02,1398.55 664.8,1375.77 U2.21
PB11: P1.15 U2.22 | length 1036.9
  Top Layer w8: P1.15 148.95,858 229.15,858 310.49,939.35 310.49,1088.49 458.7,1236.7 458.7,1334.59 508.67,1384.55 635.22,1384.55 645.12,1374.66 U2.22
PB12: P1.16 U2.25 | length 604.8
  Top Layer w8: P1.16 203.45,812.5 234.5,812.5 324.49,902.49 324.49,1082.69 442.94,1201.13 U2.25
PB13: P1.17 U2.26 | length 755.7
  Top Layer w8: P1.17 152.95,762 234,762 338.49,866.49 338.49,1076.89 443.05,1181.45 U2.26
PB14: P1.18 U2.27 | length 653
  Top Layer w8: P1.18 210.07,709.07 352.49,851.49 352.49,1071.09 443.17,1161.76 U2.27
PB15: P1.19 U2.28 | length 812.6
  Top Layer w8: P1.19 144.95,654 211,654 366.49,809.49 366.49,1058.22 450.47,1142.2 U2.28@546.07,1142.2
PC13: P2.7 U2.2 | length 1301.1
  Top Layer w8: U2.2 922.29,1004.28 934.99,991.58 934.99,869.01 955,849 955,831.8 968.8,818 1058,818 1144,732 1218,732 1288,802 1288,1151.86 1305,1168.86 v2(1305,1169)
  Bottom Layer w8: v2(1305,1169) 1345.07,1209.07 P2.7
PC14: C5.1 U2.3 Y2.1 | length 482.7
  Top Layer w8: U2.3 927,1023.97 950.96,1000.01 950.96,892.88 991.16,852.69 C5.1 1006.31,866.99 1006.31,868.2 1027.11,889 1076.27,889 Y2.1
PC15: C6.1 U2.4 Y2.2 | length 378.7
  Top Layer w8: U2.4 934.31,1043.65 966.39,1011.57 966.39,976.28 997,945.67 C6.1 1011.31,930.38 1011.31,928.69 1030,910 1140,910 1167.31,882.69 Y2.2
PD0: C7.2 U2.5 Y1.2 | length 338.5
  Top Layer w8: U2.5 944.35,1063.34 C7.2 1028.81,1042.5 1157.22,1042.5 1173.4,1058.69 Y1.2
PD1: C8.2 U2.6 Y1.1 | length 405.1
  Top Layer w8: U2.6 995.65,1083.02 997,1081.67 1011.31,1095.98 1029.33,1114 1115.51,1114 1188.01,1186.51 Y1.1
V5V: C12.1 F1.2 U1.3 | length 202.9
  Top Layer w30: U1.3 1159.69,1717.77 1158.72,1718.74 1158.72,1786.04 C12.1 1158.72,1816.04 1158.72,1867.87 1181.49,1890.63 1181.49,1893.26 F1.2
VBAT: C14.1 P2.3 U2.1 | length 1589
  Top Layer w8: U2.1 911.2,984.6 919.56,976.23 919.56,855.44 941,834 941,822.63 977.69,785.94 977.69,756.31 C14.1
  Top Layer w20: C14.1 992,709 1025,676 1271,676 1352,757 1352,1347 1414,1409 P2.3@1589,1409
VCC: C13.1 C16.2 C17.2 C18.2 P1.2 P1.20 P2.4 R1.2 R2.1 R3.1 R4.2 R7.1 U1.2 U2.24 U2.36 U2.48 | length 7621.3
  Top Layer w8: C17.2@546.98,820 556.5,820 C17.2@566.84,809.67 ; U2.48 822.28,876.75 ; C16.2@882.01,826.31 C16.2@872.72,826.31 ; 822.28,876.75 822.28,866.45 862.43,826.31 C16.2@872.72,826.31 ; 822.28,876.75 C16.2@872.72,826.31
  Top Layer w10: U2.36@536.85,982.6 536.85,863.34 ; C18.2 543.91,1338.8 543.91,1309.51 552.7,1300.72 594.56,1300.72 605.75,1289.53 U2.24 ; C17.2@546,820 536.85,829.15 536.85,863.34 ; C17.2@546.14,827.15 v2@546.14,854.05 ; U2.36@546.14,982.6 v2@546.14,854.05 ; v2@551.58,841.58 v2(551.58,843.74) 551.58,848.61 v2@546.14,854.05 ; 536.85,863.34 v2@546.14,854.05
  Top Layer w20: P1.20 P1.20@203.95,613 ; v2(513.84,1340.69) 514.18,1341.02 541.03,1341.02 C18.2 ; v2@551.58,841.58 554.71,838.44 554.71,821.79 C17.2@556.5,820 ; C16.2 888.79,824.78 904.61,824.78 v2(906.14,826.31) ; v2(1056,1271) 1056,1234 1055,1233 R7.1@1062,1226
  Top Layer w22: U1.2@1197.94,1640.59 U1.2@1203.05,1645.71 ; 1247.49,1570.56 1270.56,1547.5 ; 1270.56,1570.56 1270.56,1547.5 ; C13.1@1270.56,1646.45 1374.88,1646.45 1424.38,1695.96 1424.38,1697.58 1436.37,1709.57 R3.1@1437.99,1709.57 ; R3.1 1436.79,1710.98 1436.79,1801.66 R2.1 R1.2 ; v2(1569,278) 1569.16,277.84 1619.23,277.84 R4.2 ; P2.4 1644.08,1460 1333.63,1460 1270.56,1523.07 1270.56,1547.5
  Top Layer w30: P1.2 307.42,1509.07 403.14,1604.79 819.74,1604.79 853.96,1570.56 894.58,1570.56 1247.49,1570.56 ; U1.2@1203.05,1645.71 C13.1 ; C13.1@1270.56,1646.45 1270.56,1593.63 ; 1247.49,1570.56 1270.56,1570.56 1270.56,1593.63 ; 1247.49,1570.56 1270.56,1593.63
  Bottom Layer w20: 270,1136 270,1138 ; v2(894.58,1570.79) v2@894.45,1570.65 ; v2(906.14,826.31) 903.98,826.31 899.26,831.02 657.02,831.02 641.12,815.12 580.2,815.12 v2(551.58,843.74) 538.44,856.88 538.44,1227.58 513.84,1252.17 v2(513.84,1340.69) 564.81,1391.65 835.21,1391.65 ; v2(1056,1271) 981.25,1271 860.6,1391.65 ; 835.21,1391.65 860.6,1391.65 ; 835.21,1391.65 860.6,1417.04 ; 860.6,1391.65 860.6,1417.04 ; 860.6,1417.04 860.6,1536.81 ; 860.6,1536.81 v2@894.45,1570.65 ; 860.6,1536.81 v2(860.6,1570.52) 860.74,1570.65 v2@894.45,1570.65
  Bottom Layer w22: P1.20@210,606 273,543 273,262 363,172 1463,172 v2(1569,278)
  Bottom Layer w30: P1.20 270,679.05 270,1136 ; P1.2 270,1439.08 270,1138
VDDA: C15.1 R7.2 U2.9 | length 182.3
  Top Layer w8: U2.9 947.44,1142.08 972.05,1166.69 C15.1
  Top Layer w20: C15.1 R7.2@997,1233
pads on no net: P7.A8 P7.B8 S2.0 S2.2 U2.0

## Polygon pours and split planes (outlines as drawn)
GND on Bottom Layer "GND" (hatched 90Degree grid 8 track 8, remove dead copper, pour order 0): -1,2211.42 -1,-3 1805,-3 1805,2204.4
GND on Top Layer "GND" (hatched 90Degree grid 8 track 8, remove dead copper, pour order 1): -8,2204.72 1805,2204.72 1805,-7 -8,-7

## Keep-outs
Keep-Out Layer:
  lines w15: 0,78.74 ccw(c78.74,78.74) 78.74,0 1722.57,0 ccw(c1722.57,78.74) 1801.31,78.74 1801.31,2126.01 ccw(c1722.6,2126.01) 1722.6,2204.72 78.74,2204.72 ccw(c78.74,2125.98) 0,2125.98 0,78.74

## Silkscreen, mask and mechanical layers (free items; w line width, h text height)
Top Overlay:
  region: 1565.06,1611.85 1610.16,1611.85 1587.33,1567.51
  region: 1316.49,1592.42 1361.59,1592.42 1338.76,1548.08
  region: 277.09,1596.76 322.19,1596.76 299.36,1552.41
  region: 76.83,1612.6 121.93,1612.6 99.1,1568.26
  lines w10: 49.82,508.25 22.93,508.25 22.93,249.65 64.24,249.65 ; 253.53,152.17 253.53,279.56 ; 375.87,1542.18 375.87,760.43 400.7,760.43 400.7,604.5 ; 1404.76,472.83 1404.76,1554.57
  text "GND" at 124.53,1970.03 h35
  text "OFF" at 1227.25,1949.72 h35
  text "ON" at 1365.83,1949.72 h35
  text "GND" at 264.2,1493.46 h32
  text "3V3" at 394.4,1493.46 h32
  text "LED1" at 1292.09,1482.4 h32
  text "LED2" at 1423.95,1482.4 h32
  text "PA0" at 264.2,1393.46 h32
  text "PA1" at 394.4,1393.46 h32
  text "VBAT" at 1264.97,1385.51 h32
  text "3V3" at 1440.77,1385.51 h32
  text "PA2" at 264.2,1293.46 h32
  text "PA3" at 394.4,1293.46 h32
  text "PB9" at 1298.33,1285.62 h32
  text "GND" at 1437.41,1285.62 h32
  text "PA4" at 264.2,1193.45 h32
  text "PA5" at 394.4,1193.45 h32
  text "PC13" at 1283,1185.73 h32
  text "PA13" at 1413.95,1185.73 h32
  text "PA6" at 264.2,1093.45 h32
  text "PA7" at 394.4,1093.45 h32
  text "PB8" at 1296.81,1082.84 h32
  text "PA14" at 1412.43,1082.84 h32
  text "PB0" at 264.2,993.45 h32
  text "PB1" at 394.4,993.45 h32
  text "PB7" at 1296.81,982.95 h32
  text "NRST" at 1410.6,982.95 h32
  text "PB2" at 264.2,893.44 h32
  text "PB10" at 394.4,893.44 h32
  text "PB6" at 1298.33,885.06 h32
  text "PB5" at 1440.77,885.06 h32
  text "PB11" at 264.2,793.44 h32
  text "PB12" at 391.4,793.44 h32
  text "PB4" at 1295.29,786.17 h32
  text "PB3" at 1440.77,786.17 h32
  text "PB13" at 264.2,693.44 h32
  text "PB14" at 414.4,693.44 h32
  text "PA15" at 1277,683.27 h32
  text "PA12" at 1413.95,683.27 h32
  text "PB15" at 264.2,618.43 h32
  text "3V3" at 414.4,618.43 h32
  text "PA11" at 1283.71,583.38 h32
  text "PA10" at 1413.95,583.38 h32
  text "PA9" at 1294.98,483.49 h32
  text "PA8" at 1437.41,483.49 h32
  text "CH32Vx03C-R0-1v0" at 1070.96,399.09 h40
  text "BOOT0" at 72.67,229.73 h35
  text "GND" at 268.54,229.73 h35
  text "BOOT1" at 72.67,143.63 h35
  text "GND" at 268.54,143.63 h35
Mechanical 1:
  lines w8: 1801.31,2126.01 ccw(c1722.6,2126.01) 1722.6,2204.72 78.74,2204.72 ccw(c78.74,2125.98) 0,2125.98 0,78.74 ccw(c78.74,78.74) 78.74,0 1722.57,0 ccw(c1722.57,78.74) 1801.31,78.74 1801.31,2126.13

## Text inside footprints (layer, text, board x,y; h text height)
D1: Top Overlay "+" at 1569.94,1885.58 h40 r90
D2: Top Overlay "+" at 1569.94,1792.08 h40 r90
D3: Top Overlay "+" at 1569.94,1698.58 h40 r90
P6: Top Overlay "G" at 580.88,1815.37 h40 r180; Top Overlay "V" at 860.88,1815.37 h40 r180; Top Overlay "D+" at 690.88,1815.37 h40 r180; Top Overlay "D-" at 780.88,1815.37 h40 r180
P8: Top Overlay "G" at 825.29,391.69 h40; Top Overlay "V" at 545.29,391.69 h40; Top Overlay "D+" at 715.29,391.69 h40; Top Overlay "D-" at 625.29,391.69 h40